# EAGLE board Power PCB 200 (EAGLE 7.5.0)
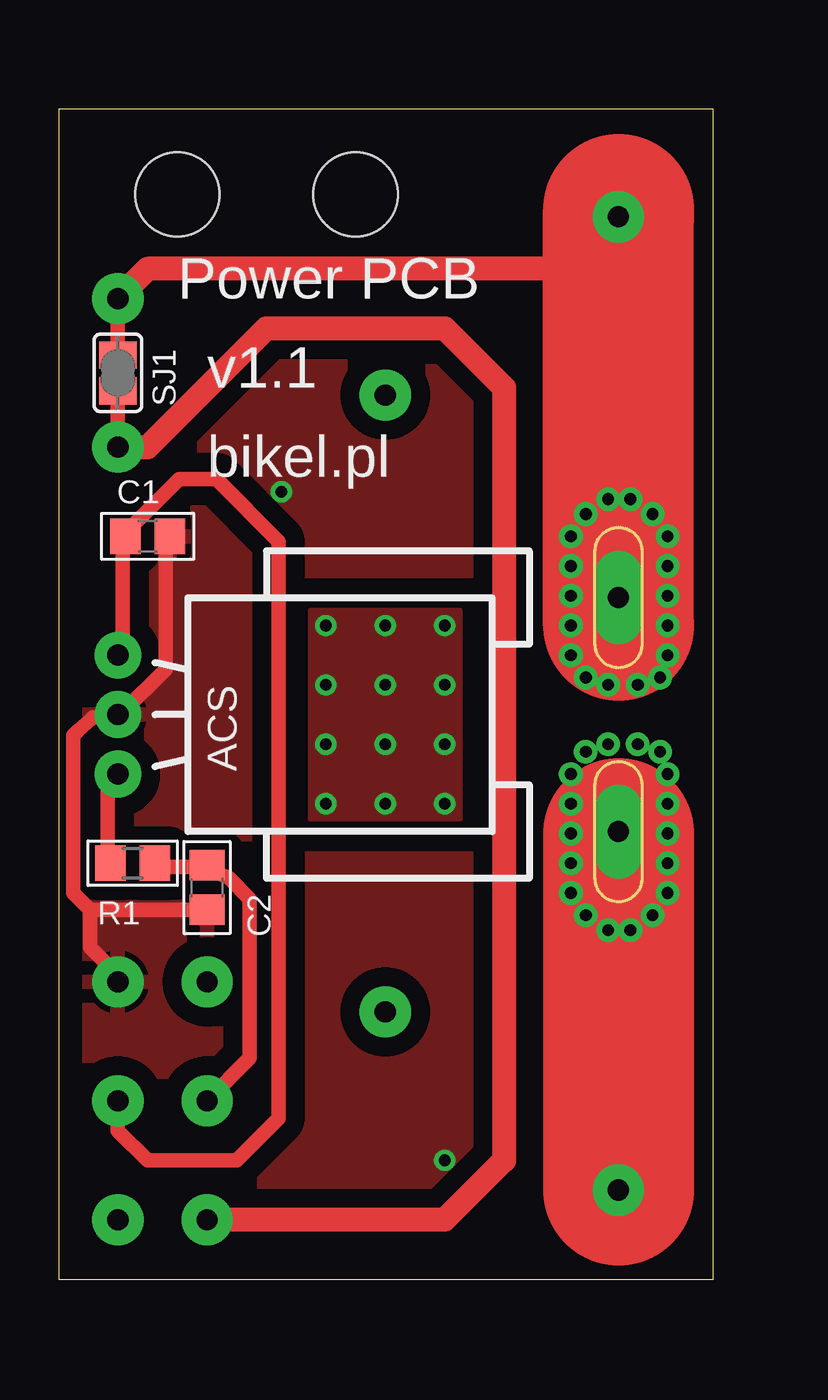
[diagram p0: board, top side]
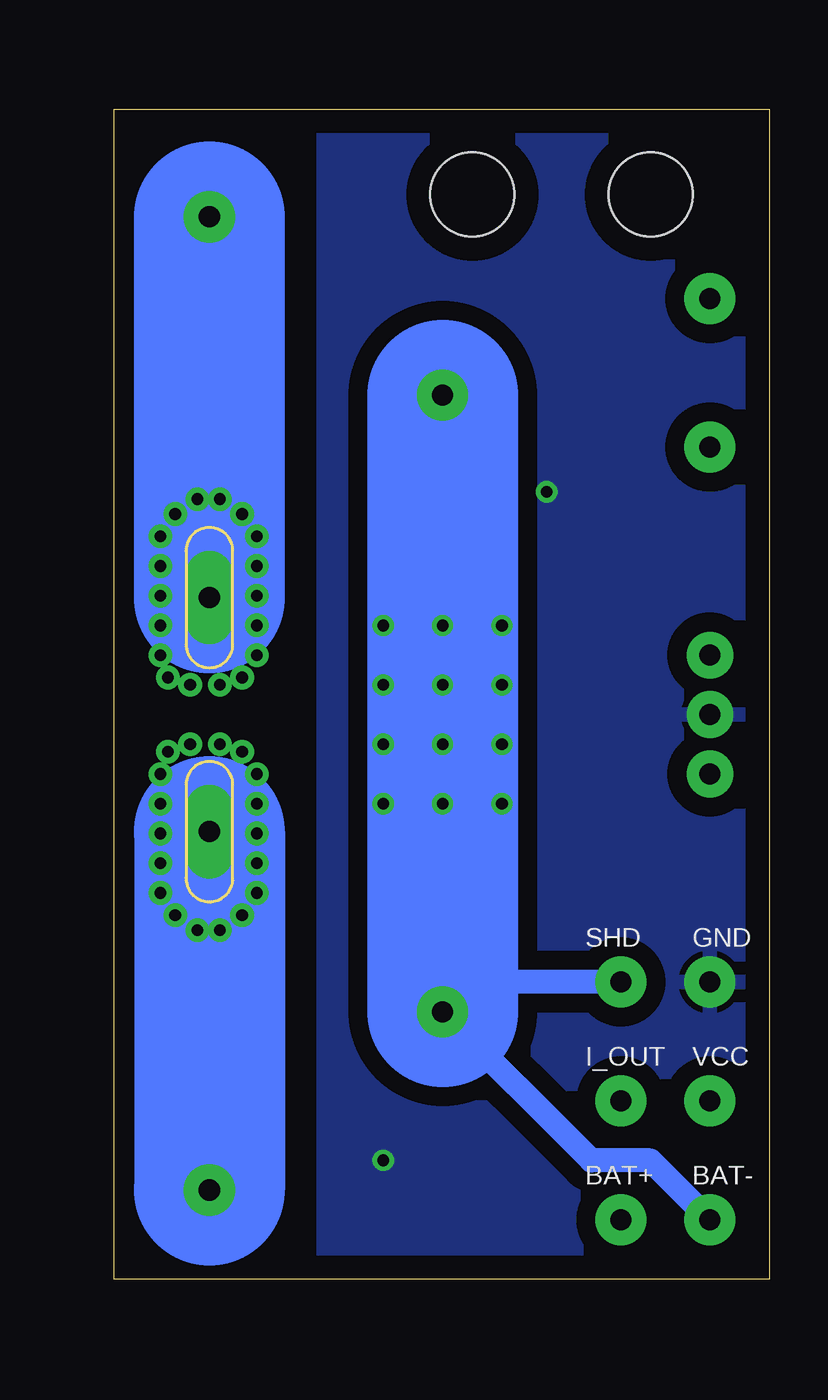
[diagram p1: board, bottom side, seen from below]

Size 28 x 50 mm. Coordinates in mm from the lower left corner, seen from the top.
Outline: 0,0 28,0 28,50 0,50 0,0
Copper layers (1*16): Top 0.035mm / dielectric 1.5mm / Bottom 0.035mm
Design rules "default *": minimum track width 10mil, minimum drill 24mil, track to track 8mil, track to pad 8mil, pad to pad 8mil, via to via 8mil, smd to smd 8mil, copper to edge 40mil, drill to drill 8mil, minimum pad ring 10mil, minimum via ring 8mil, stop-mask expansion 4mil, vias tented up to drill 0.6mm, thermal gap 10mil
Holes 3.6 mm at 5.08,46.35 12.7,46.35

## Footprints (pad centres in the part's own frame; a part is rotated, then mirrored left to right if it is on the bottom)
ACS758-PFF = drill 0.9 pad 2: GND 0,0; VCC -2.54,0; VIOUT 2.54,0 | drill 0.9 pad 2 long: LOAD1 -5,21.4; LOAD2 5,21.4 | drill 0.5 pad 0.61: P$1 -5.08,23.495; P$2 -5.08,19.367; P$3 -1.27,22.225; P$4 -1.27,20.955; P$5 -3.81,23.495; P$6 -2.54,23.495; P$7 -1.587,23.177; P$8 -1.587,20.003; P$9 -2.54,19.367; P$10 -3.81,19.367; P$11 -6.35,19.367; P$12 -7.62,19.367; P$13 -8.572,20.003; P$14 -9.207,20.955; P$15 -9.207,21.907; P$16 -8.572,22.86; P$17 -7.62,23.495; P$18 -6.35,23.495; P$19 1.587,23.177; P$20 2.54,23.495; P$21 3.81,23.495; P$22 5.08,23.495; P$23 6.35,23.495; P$24 7.62,23.495; P$25 8.572,22.86; P$26 9.207,21.907; P$27 9.207,20.955; P$28 8.572,20.003; P$29 7.62,19.367; P$30 6.35,19.367; P$31 5.08,19.367; P$32 3.81,19.367; P$33 2.54,19.367; P$34 1.587,20.003; P$35 1.27,20.955; P$36 1.27,22.225
1X01 = drill 0.9 pad 2.184: 1 0,0
C0805 = smd 1.3 x 1.5: 1 -0.95,0; 2 0.95,0
R0805 = smd 1.3 x 1.5: 1 -0.95,0; 2 0.95,0
SJ = smd 1.168 x 1.6: 1 -0.762,0; 2 0.762,0

## Placement (x,y rotation side)
ACS758_1  ACS758  [ACS758-PFF]  2.54,24.13 270 top
BAT+  [1X01]  6.35,2.54 0 top
BAT-  [1X01]  2.54,2.54 0 top
C1  100nF  [C0805]  3.81,31.75 0 top
C2  100nF  [C0805]  6.35,16.74 270 top
GND  [1X01]  2.54,12.7 0 top
I_OUT  [1X01]  6.35,7.62 0 top
JP4  [1X01]  23.94,45.4 0 top
JP5  [1X01]  23.94,3.81 0 top
JP6  [1X01]  13.97,37.78 0 top
JP7  [1X01]  13.97,11.43 0 top
R1  1k  [R0805]  3.17,17.78 180 top
SHD  [1X01]  6.35,12.7 0 top
SJ1  [SJ]  2.54,38.73 270 top
VCC  [1X01]  2.54,7.62 0 top

## Library data of the parts
ACS758_1 = _marek
BAT+ BAT- GND I_OUT JP4-JP7 SHD VCC = pinhead
C1 C2 R1 = resistor
SJ1 = jumper

## Nets
BAT-: BAT-.1 JP6.1 JP7.1 SHD.1
GND: ACS758_1.GND C1.2 C2.2 GND.1
N$1: ACS758_1.VIOUT R1.2
N$2: C2.1 I_OUT.1 R1.1
N$4: ACS758_1.LOAD1 JP4.1 SJ1.1
N$5: ACS758_1.LOAD2 JP5.1
N$6: BAT+.1 SJ1.2
N$8: ACS758_1.VCC C1.1 VCC.1

## Tracks (layer width: path | path; a pad name or v marks a point on that pad's centre or on a via)
BAT-  (via drill 0.5)
  Bottom 0.61: 11.43,12.7 12.7,11.43 JP7.1
  Bottom 1.016: SHD.1 11.43,12.7 | BAT-.1 5.08,5.08 7.62,5.08 JP7.1
  Bottom 6.452: JP6.1 v13.97,27.94 v13.97,25.4 v13.97,22.86 v13.97,20.32 JP7.1
  other vias: 11.43,27.94 16.51,25.4 16.51,27.94 16.51,22.86 16.51,20.32 11.43,20.32 11.43,22.86 11.43,25.4
  pour Top: 10.79,28.57 17.14,28.57 17.14,19.68 10.79,19.68
GND  (via drill 0.5)
  Top 0.254: 2.52,24 ACS758_1.GND 2.74,24.23 | 4.57,31.55 C1.2
  Top 0.61: 2.52,24 1.46,24 1.43,23.97 0.83,23.43 0.64,23.23 0.64,16.51 1.36,15.79 | 4.57,31.55 4.57,26.06 2.74,24.23 | 1.36,15.79 C2.2 | 2.74,12.8 1.36,14.19 1.36,15.79
  Bottom 0.61: 2.74,24.23 ACS758_1.GND
  other vias: 9.53,33.66 16.51,5.08
  pour Top (isolate 0.813): -1.27,50.8 30.48,50.8 30.48,-1.27 -1.27,-1.27
  pour Bottom (isolate 0.813): 0,49.53 19.05,49.53 19.05,0 0,0
N$1
  Top 0.254: 2.11,17.83 R1.2
  Top 0.61: 2.11,17.83 2.11,20.85 ACS758_1.VIOUT
N$2
  Top 0.254: 6.17,17.63 C2.1 6.4,17.4
  Top 0.61: 6.4,17.4 6.67,17.4 7.3,17.14 8.18,16.26 8.18,9.45 I_OUT.1 | 6.17,17.63 4.12,17.63 R1.1
N$3
  cutout Top: 10.16,29.84 18.41,29.84 18.41,18.41 10.16,18.41 10.16,19.05 17.78,19.05 17.78,29.21 10.16,29.21
N$4  (via drill 0.9 pad 2.18)
  Top 0.61: SJ1.1 v2.54,41.91
  Top 1.016: JP4.1 23.94,45.91 21.59,43.18 3.81,43.18 v2.54,41.91
  Top 6.452: 23.94,27.94 JP4.1 23.94,45.72
  Bottom 6.452: ACS758_1.LOAD1 JP4.1
N$5
  Top 6.452: 23.94,19.05 JP5.1
  Bottom 6.452: ACS758_1.LOAD2 JP5.1
N$6  (via drill 0.9 pad 2.18)
  Top 0.61: SJ1.2 v2.54,35.56
  Top 1.016: v2.54,35.56 3.81,35.56 8.89,40.64 16.51,40.64 19.05,38.1 19.05,5.08 16.51,2.54 BAT+.1
N$8
  Top 0.254: 2.74,31.55 C1.1 2.74,31.77
  Top 0.61: 2.74,31.55 2.74,26.75 ACS758_1.VCC | 2.74,31.77 5.16,34.19 6.76,34.19 9.41,31.53 9.41,6.87 7.62,5.08 3.81,5.08 2.54,6.35 VCC.1

## Text on the board
tNames: Power PCB | v1.1 | bikel.pl